# EAGLE board untitled (EAGLE 6.1)
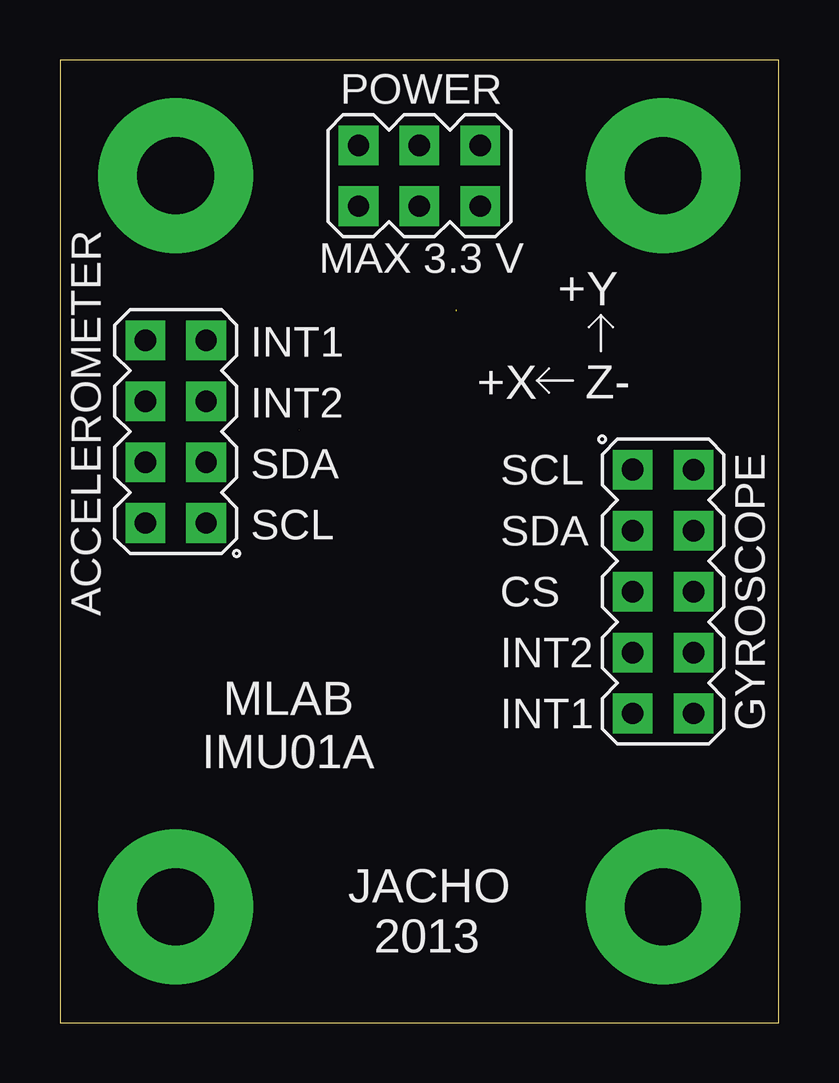
[diagram p0: board, top side]
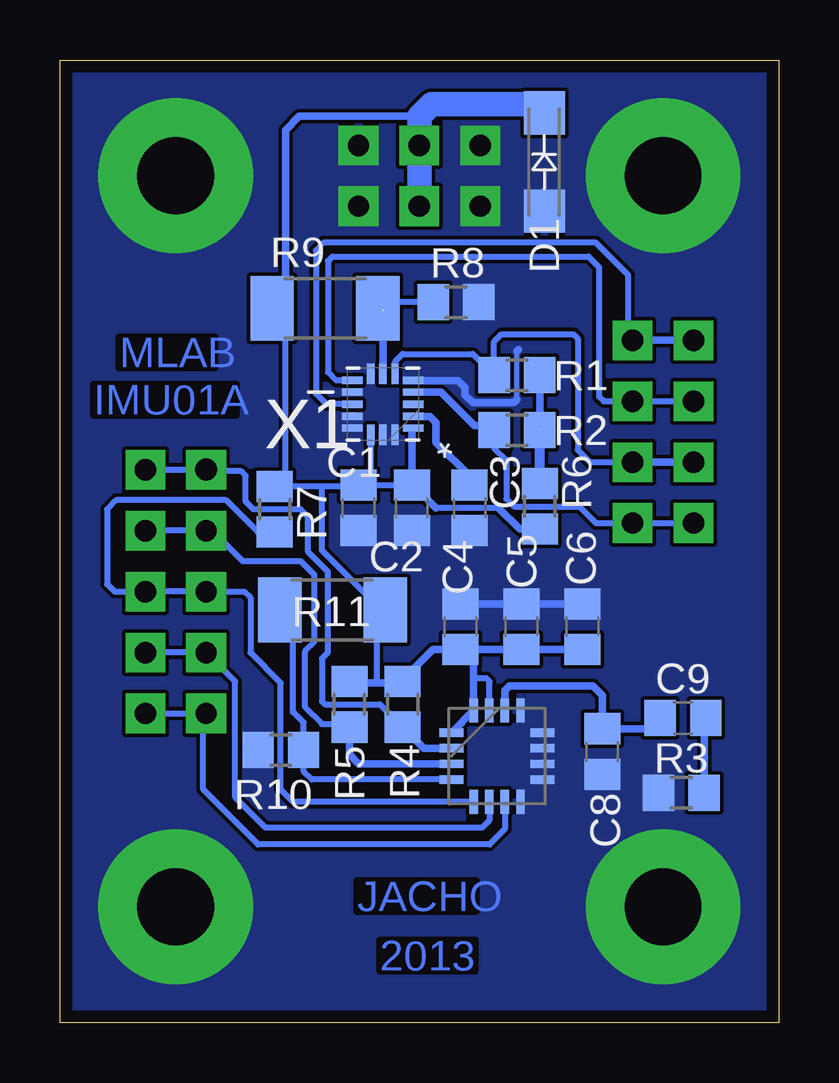
[diagram p1: board, bottom side, seen from below]

Size 29.97 x 40.13 mm. Coordinates in mm from the lower left corner, seen from the top.
Outline: 0,0 29.97,0 29.97,40.13 0,40.13 0,0
Copper layers (1*16): Top 0.035mm / dielectric 1.5mm / Bottom 0.035mm
Design rules: minimum track width 8mil, minimum drill 16mil, track to track 6mil, track to pad 6mil, pad to pad 6mil, via to via 6mil, smd to smd 6mil, copper to edge 20mil, drill to drill 8mil, minimum pad ring 10mil, minimum via ring 8mil, stop-mask expansion 4mil, vias tented up to drill 25mil, thermal gap 0mil

## Footprints (pad centres in the part's own frame; a part is rotated, then mirrored left to right if it is on the bottom)
C0805 = smd 1.3 x 1.5: 1 -0.95,0; 2 0.95,0
SMA = smd 1.8 x 1.7: A -2.05,0; K 2.05,0
R0805 = smd 1.3 x 1.5: 1 -0.95,0; 2 0.95,0
0805 = smd 1.3 x 1.5: 1 -0.95,0; 2 0.95,0
R2010 = smd 1.8 x 2.7: 1 -2.2,0; 2 2.2,0
MA03-2 = drill 0.889 pad 1.651 square: 1 -2.54,-1.27; 2 -2.54,1.27; 3 0,-1.27; 4 0,1.27; 5 2.54,-1.27; 6 2.54,1.27
MA05-2 = drill 0.914 pad 1.651 square: 1 -5.08,-1.27 | drill 0.889 pad 1.651 square: 2 -5.08,1.27; 3 -2.54,-1.27; 4 -2.54,1.27; 5 0,-1.27; 6 0,1.27; 7 2.54,-1.27; 8 2.54,1.27; 9 5.08,-1.27; 10 5.08,1.27
MA04-2 = drill 0.889 pad 1.651 square: 1 -3.81,-1.27; 2 -3.81,1.27; 3 -1.27,-1.27; 4 -1.27,1.27; 5 1.27,-1.27; 6 1.27,1.27; 7 3.81,-1.27; 8 3.81,1.27
QFN50P300X300X100-16N = smd 0.864 x 0.305: 1 -1.27,0.991; 2 -1.27,0.508; 3 -1.27,0; 4 -1.27,-0.508; 5 -1.27,-0.991; 9 1.27,-0.991; 10 1.27,-0.508; 11 1.27,0; 12 1.27,0.508; 13 1.27,0.991 | smd 0.305 x 0.864: 6 -0.508,-1.27; 7 0,-1.27; 8 0.508,-1.27; 14 0.508,1.27; 15 0,1.27; 16 -0.508,1.27
LGA16 = smd 1 x 0.35: 1 -1.9,0.975; 2 -1.9,0.325; 3 -1.9,-0.325; 4 -1.9,-0.975; 9 1.9,-0.975; 10 1.9,-0.325; 11 1.9,0.325; 12 1.9,0.975 | smd 0.35 x 1: 5 -0.975,-1.9; 6 -0.325,-1.9; 7 0.325,-1.9; 8 0.975,-1.9; 13 0.975,1.9; 14 0.325,1.9; 15 -0.325,1.9; 16 -0.975,1.9
SROUB3M = drill 3.2 pad 6.452: P$1 0,0

## Placement (x,y rotation side)
C1  4u7  [C0805]  17.53,21.46 270 bottom
C2  100n  [C0805]  15.3,21.46 270 bottom
C3  100n  [C0805]  12.89,21.46 270 bottom
C4  100n  [C0805]  13.27,16.51 90 bottom
C5  4u7  [C0805]  10.73,16.51 90 bottom
C6  4u7  [C0805]  8.19,16.51 90 bottom
C8  10nF  [C0805]  7.37,11.3 270 bottom
C9  470nF  [C0805]  4,12.7 0 bottom
D1  M4  [SMA]  9.78,35.88 90 bottom
R1  4k7  [R0805]  10.92,26.99 180 bottom
R2  4k7  [R0805]  10.92,24.7 180 bottom
R3  10k  [R0805]  4.06,9.59 0 bottom
R4  10k  [R0805]  15.68,13.27 270 bottom
R5  10k  [R0805]  17.91,13.27 270 bottom
R6  0R  [R0805]  9.97,21.53 90 bottom
R7  10k  [R0805]  21.02,21.4 270 bottom
R8  0R  [0805]  13.46,30.04 0 bottom
R9  [R2010]  18.92,29.78 0 bottom
R10  0R  [0805]  20.76,11.37 180 bottom
R11  [R2010]  18.61,17.21 180 bottom
SV1  [MA03-2]  14.99,35.31 180 top
SV2  [MA05-2]  25.15,17.97 270 top
SV4  [MA04-2]  4.83,24.64 90 top
X1  MMA8451Q  [QFN50P300X300X100-16N]  16.51,25.78 180 bottom
X2  A3G4250D  [LGA16]  11.75,11.11 0 bottom
X3  SROUB3M  [SROUB3M]  4.83,4.83 0 top
X4  SROUB3M  [SROUB3M]  4.83,35.31 0 top
X5  SROUB3M  [SROUB3M]  25.15,4.83 0 top
X6  SROUB3M  [SROUB3M]  25.15,35.31 0 top

## Library data of the parts
C1-C6 C8 C9 R1-R7 R9 R11 = rcl
D1 X3-X6 = moje
R8 R10 = moje_R
SV1 SV2 SV4 = moje_hrebinky; OC_FARNELL: unknown; OC_NEWARK: unknown
X1 X2 = moje_cidla

## Nets
+VCC: C1.1 C2.1 C4.1 C5.1 C6.1 D1.K R4.1 R5.1 R6.1 R7.1 R9.1 R11.1 SV1.3 SV1.4 X1.1 X1.14 X2.1 X2.15 X2.16
GND: C1.2 C2.2 C3.2 C4.2 C5.2 C6.2 C8.2 D1.A R3.1 R8.2 R10.2 SV1.1 SV1.2 SV1.5 SV1.6 X1.5 X1.8 X1.10 X1.12 X1.13 X1.15 X1.16 X2.8 X2.9 X2.10 X2.11 X2.12 X2.13 X3.P$1 X4.P$1 X5.P$1 X6.P$1
N$1: R1.2 SV4.3 SV4.4 X1.6
N$2: R2.2 SV4.1 SV4.2 X1.4
N$3: R8.1 R9.2 X1.7
N$4: C8.1 C9.1 X2.14
N$5: C3.1 X1.2
N$7: R1.1 R2.1 R6.2
N$8: SV4.5 SV4.6 X1.9
N$9: R7.2 SV2.5 SV2.6 X2.5
N$10: SV2.9 SV2.10 X2.7
N$11: SV2.7 SV2.8 X2.6
N$12: SV4.7 SV4.8 X1.11
N$14: R4.2 SV2.1 SV2.2 X2.2
N$15: C9.2 R3.2
N$16: R5.2 SV2.3 SV2.4 X2.3
SA0: R10.1 R11.2 X2.4

## Tracks (layer width: path | path; a pad name or v marks a point on that pad's centre or on a via)
+VCC
  Bottom 0.254: 11.68,21.46 14.29,21.46 | X2.15 12.07,14.22 12.19,14.35 12.72,14.35 | 21.14,29.65 20.64,30.16 20.64,30.42 20.57,30.35 20.57,22.48 20.45,22.35 | 17.97,14.16 R5.1 | X1.14 17.02,22.48 17.08,22.41 | 17.08,22.41 17.02,22.41 | 17.02,22.41 C2.1 | 17.08,22.41 17.21,22.29 17.27,22.29 17.4,22.41 17.46,22.41 17.53,22.35 19.18,22.35 | 17.08,22.41 17.14,22.41 17.21,22.35 | C1.1 17.02,22.41 | 19.18,22.35 20.45,22.35 | 20.45,22.35 20.89,22.35 | 20.89,22.35 21.02,22.48 | 20.89,22.35 R7.1 | 19.18,22.35 19.05,22.29 19.05,19.68 17.21,17.84 16.83,17.84 | 16.76,14.29 16.76,16.45 16.6,16.61 R11.1 17.08,17.59 16.83,17.84 | 16.76,14.29 16.83,14.22 | 16.76,14.29 16.76,14.22 16.83,14.16 | 16.83,17.84 16.76,17.91
  Bottom 0.305: X2.1 X2.16 12.72,14.35 12.72,15.01 C4.1 | C4.1 C5.1 C6.1 | C2.1 15.3,24.73 X1.1 | C2.1 15.18,22.29 15.18,22.41 15.11,22.48 | R6.1 10.8,20.58 11.68,21.46 | 14.29,21.46 14.99,22.16 15.18,22.16 15.24,22.22 15.24,22.35 C2.1 | C4.1 14.41,15.56 15.75,14.22 R4.1 | R4.1 15.62,14.16 16.83,14.16 17.97,14.16 | R4.1 | 13.72,38.48 13.53,38.29 | 14.99,37.78 20,37.78 20.57,37.21 20.57,30.35 | 20.76,30.54 20.64,30.42 | 21.14,29.65 21.14,29.76 R9.1
  Bottom 1.016: SV1.4 SV1.3 | SV1.3 15.05,36.64 | SV1.3 14.99,37.78 14.48,38.29 13.53,38.29 10.14,38.29 D1.K
GND
  Bottom 0.205: 10.92,25.97 10.92,28
  Bottom 0.305: C6.2 C5.2 C4.2 | X1.5 13.37,26.77 13.08,26.48 13.08,26.16 12.76,25.84 11.05,25.84 10.92,25.97 | 10.92,28 10.86,28.07
  pour Bottom: -1.14,41.15 32.45,41.15 32.45,-2.6 -1.4,-2.6 -1.4,41.02
N$1
  Bottom 0.254: SV4.3 7.43,23.37 7.62,23.37 7.87,23.37 8.38,23.88 8.38,28.51 8.57,28.7 11.56,28.7 11.87,28.39 R1.2 12.76,27.88 15.68,27.88 16,27.56 X1.6
  Bottom 0.305: SV4.3 SV4.4
N$2
  Bottom 0.254: R2.2 11.87,23.94 11.37,23.43 11.37,21.84 11.05,21.53 8.32,21.53 7.62,20.83 SV4.1 SV4.2
  Bottom 0.305: X1.4 14.1,26.29 12.7,24.89 12.06,24.89 R2.2
N$3  (1 unrouted)
  Bottom 0.254: R8.1 16.47,30.04 R9.2 16.64,29.78 16.51,29.65
  Bottom 0.305: X1.7 16.51,29.72
N$4
  Bottom 0.305: X2.14 11.42,13.85 11.24,14.03 7.75,14.03 7.37,13.65 C8.1 5.4,12.25 C9.1
N$5
  Bottom 0.305: C3.1 12.83,22.73 14.29,24.19 14.29,25.02 14.54,25.27 X1.2
N$7  (1 unrouted)
  Bottom 0.305: R1.1 R2.1 | R2.1 | R2.1 10.03,24.76
  Bottom 0.406: R6.2 R2.1
N$8
  Bottom 0.254: SV4.6 SV4.5 7.3,25.91 7.49,26.1 7.49,31.5 7.94,31.94 18.61,31.94 18.8,31.75 18.8,27.11 18.45,26.77 X1.9
N$9
  Bottom 0.254: R7.2 21.72,20.45 23.05,21.78 27.62,21.78 28,21.4 28,18.29 27.69,17.97 SV2.6 SV2.5 22.29,17.97 22.03,17.72 22.03,15.43 20.76,14.16 20.76,9.72 20.26,9.21 X2.5
N$10
  Bottom 0.254: X2.7 11.42,8.07 12.07,7.43 21.72,7.43 24,9.72 24,12.76 SV2.9 SV2.10
N$11
  Bottom 0.254: SV2.8 SV2.7 22.67,14.22 22.67,9.4 21.4,8.13 12.38,8.13 12.07,8.44 X2.6
N$12
  Bottom 0.254: SV4.7 6.29,28.64 6.29,31.18 7.62,32.51 18.99,32.51 19.3,32.2 19.3,26.23 18.86,25.78 X1.11
  Bottom 0.305: SV4.7 SV4.8
N$14
  Bottom 0.254: 15.88,12.32 15.88,12.38 15.81,12.45 16.64,13.27 18.92,13.27 19.05,13.4 19.05,15.18 18.8,15.43 18.8,18.8 19.62,19.62 19.62,21.08 19.94,21.4 21.91,21.4 22.22,21.72 22.22,22.8 22.41,22.99 23.81,22.99 SV2.1 SV2.2
  Bottom 0.305: 15.88,12.32 R4.2 14.8,11.44 X2.2
N$15
  Bottom 0.305: R3.2 3.11,12.64 C9.2
N$16
  Bottom 0.254: 17.84,12.45 17.97,12.32 R5.2 17.84,12.38 17.84,12.51 17.91,12.45 19.05,12.45 19.75,13.14 19.75,15.49 19.37,15.88 19.37,18.67 19.94,19.24 22.35,19.24 23.62,20.51 SV2.3 SV2.4
  Bottom 0.305: X2.3 17.52,10.79 17.91,11.18 R5.2
SA0
  Bottom 0.254: X2.4 19.47,10.14 19.81,10.48 R10.1 19.81,12.51 20.26,12.95 20.26,16.66 R11.2

## Text on the board
Bottom: MLAB | IMU01A | JACHO | 2013
tPlace: POWER | MAX 3.3 V | +Y | INT1 | +X | Z- | INT2 | SDA | SCL | SCL | SDA | CS | ACCELEROMETER | INT2 | MLAB | INT1 | GYROSCOPE | IMU01A | JACHO | 2013